# Altium PCB PCB1.PcbDoc
Units mm, origin at the board's own origin, x right, y up, seen from the top; angles counter-clockwise.
Board outline 152.4 x 101.6 mm, 2 copper layers (Top Layer, Bottom Layer); 17 components, 12 nets, 43 pads, 26 vias.
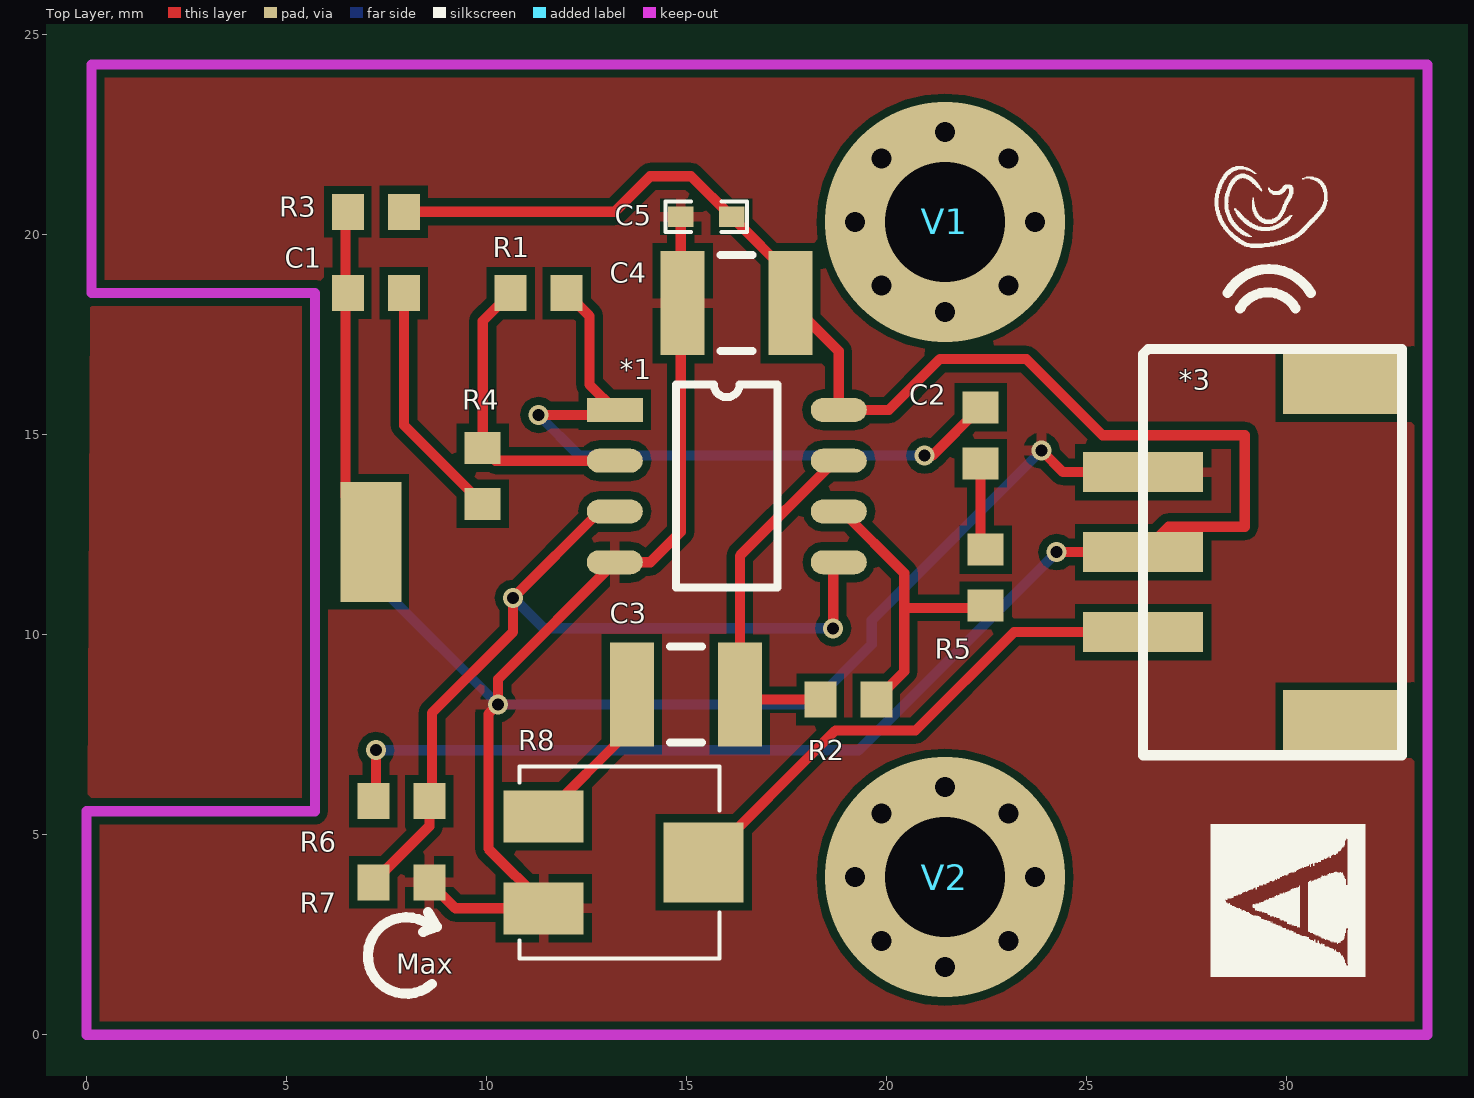
[diagram p0: Top Layer view]
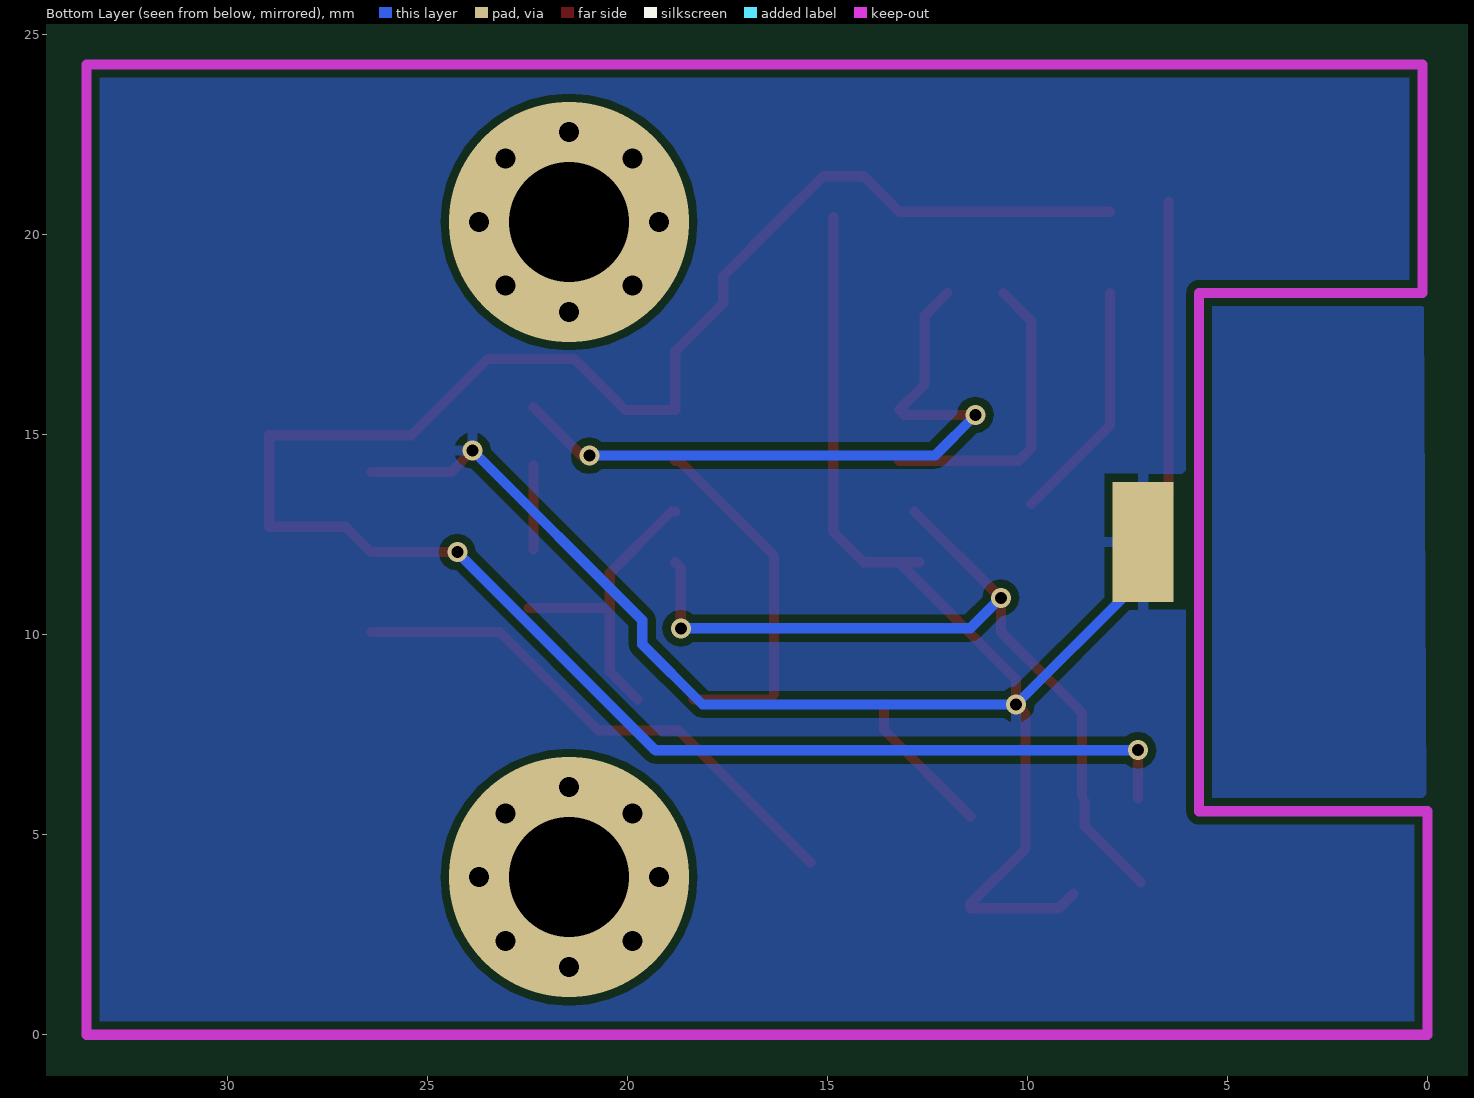
[diagram p1: Bottom Layer view, seen from below]

## Layer stack, top to bottom
Top Layer: signal copper 0.0356
Dielectric: dielectric 0.32, FR-4, Dk 4.8
Bottom Layer: signal copper 0.0356

## Board outline
-100.457,-42.926 51.943,-42.926 51.943,58.674 -100.457,58.674

## Design rules (kind name [scope] priority, off if disabled: settings)
Clearance [All] p1: gap=0.2
PolygonConnect [All] p1: connectstyle=Relief reliefconductorwidth=0.254 reliefentries=4 polygonreliefangle="90 Angle"
RoutingVias [All] p1: holewidth=0.711 width=1.27 viastyle="Through Hole" minholewidth=0.711 minwidth=1.27 maxholewidth=0.711 maxwidth=1.27
SilkscreenOverComponentPads [All] p1: minsilkscreentomaskgap=0.254
SolderMaskExpansion [All] p1: expansion=0.102
Width [All] p1: maxlimit=0.254 minlimit=0.254 preferedwidth=0.254
27 further rules are at their usual default settings.

## Components (designator, comment, footprint, x,y, rotation, side; value= is the part's Value field where it differs from the comment)
*1 "LM358" HMC_S8 13.208,15.621 r0 top
*3 "sh-2.0" sh-2.0 26.416,12.065 r90 top
C1 "CAP" 1608[0603] 7.239,18.542 r0 top
C2 "CAP" 1608[0603] 22.352,14.986 r270 top
C3 "cap1210" C1210 14.986,8.509 r180 top
C4 "cap1210" C1210 16.256,18.288 r180 top
C5 "CAP" 0402 14.859,20.447 r0 top
R1 "30K" 1608[0603] 11.303,18.542 r0 top
R2 "10K" 1608[0603] 19.05,8.382 r180 top
R3 "10K" 1608[0603] 7.239,20.574 r0 top
R4 "1K" 1608[0603] 9.906,13.97 r90 top
R5 "1K" 1608[0603] 22.479,11.43 r270 top
R6 "10K" 1608[0603] 7.874,5.842 r0 top
R7 "10K" 1608[0603] 7.874,3.81 r0 top
R8 "10k" BORUNS_3314J-1 11.43,5.461 r270 top
V1 "Via" VIA 21.463,20.32 r0 top
V2 "Via" VIA 21.463,3.937 r0 top

## Footprints (in the part's own frame and the unit in brackets; to place one, negate y for a bottom-side part, rotate by r counter-clockwise, add the part's x,y. Pads: shape width x height; smd on the part's side, far side on the other; paste and mask are expansions set on the pad)
0402 [mil]
  rect 25x20 smd: 1(0,0) 2(50,0)
  silkscreen extent -15,-15 65,15
1608[0603] [mm] "Chip Capacitor, Body 1.6x0.8mm, IPC High Density"
  rect 0.8x0.9 smd: 1(-0.7,0) 2(0.7,0)
  body extent -0.87,-0.48 0.87,0.48, height 1.3
BORUNS_3314J-1 [mm]
  rect 1.3x2 smd: 1(0,0) 2(2.3,0)
  rect 2x2 smd: 3(1.15,4)
  silkscreen extent -1.25,-0.6 3.55,4.4
C1210 [mm] "Chip Capacitor, Body 3.2x2.5mm, IPC High Density"
  rect 1.1x2.6 smd: 1(-1.35,0) 2(1.35,0)
  silkscreen extent -0.4,-1.2 0.4,1.2, body extent -1.7,-1.35 1.7,1.35, height 1.3
HMC_S8 [mm]
  rect 1.4x0.6 smd: 1(0,0)
  oval 1.4x0.6 smd: 2(0,-1.27) 3(0,-2.54) 4(0,-3.81) 5(5.6,-3.81) 6(5.6,-2.54) 7(5.6,-1.27) 8(5.6,0)
  silkscreen extent 1.53,-4.44 4.06,0.64
sh-2.0 [mm]
  rect 1x3 smd: 1(-2,0) 2(0,0) 3(2,0) 3(2,0)
  rect 1.5x3 smd: GND(-4.2,-5) GND(4.2,-5)
  silkscreen extent -5.08,-6.48 5.08,0
VIA [mm]

## Part data
C3 C4: library part cap0603
R1 R2 R3 R4 R5 R6 R7: library part RES
R8: library part "Res Tap"

## Free pads (board coordinates)
  rect 1.524x3 smd: 0(7.112,12.319)
  rect 1.524x3 smd far side: 0(7.112,12.319)

## Via types
v1: diameter 1, hole 0.5, Top Layer to Bottom Layer, 16 vias
v2: diameter 0.5, hole 0.3, Top Layer to Bottom Layer, 8 vias
v3: diameter 6, hole 3, Top Layer to Bottom Layer, 2 vias

## Nets (pads, with @x,y where several pads share a name; then routed paths per layer and width w, separated by ;. In a path a pad name is that pad's centre, name@x,y a point inside that pad or via, vN(x,y) a via of type N, cw(c..) or ccw(c..) an arc to the next point about the centre after c; other vN are vias at no path point)
GND: *1.4 *3.3 C4.2 C5.1 pad.0@7.112,12.319 R7.2 R8.2 | length 47.1
  Top Layer w0.254: R7.2@8.859,3.525 9.223,3.161 R8.2 11.43,3.272 10.049,4.653 10.049,8.017 v2(10.287,8.255) 10.287,8.89 *1.4 ; *1.4@12.7,11.811 *1.4 ; C5.1 14.859,12.573 14.097,11.811 *1.4 ; v2(23.876,14.605) 24.416,14.065 *3.3@26.416,14.065
  Bottom Layer w0.254: pad.0@7.366,11.176 v2(10.287,8.255) 18.124,8.255 19.631,9.762 19.631,10.36 v2(23.876,14.605)
Net*1_1: *1.1 C2.1 R1.2 | length 17.2
  Top Layer w0.254: v2(11.303,15.494) *1.1@13.081,15.494 ; R1.2 12.573,17.972 12.573,16.256 *1.1 ; v2(20.955,14.478) 21.144,14.478 C2.1
  Bottom Layer w0.254: v2(11.303,15.494) 12.319,14.478 v2(20.955,14.478)
Net*1_2: *1.2 R1.1 R4.2 | length 7.6
  Top Layer w0.254: R1.1 9.906,17.845 R4.2 10.225,14.351 *1.2
Net*1_3: *1.3 *1.5 R6.2 R7.1 | length 21.5
  Top Layer w0.254: R7.1 8.574,5.21 R6.2 ; R6.2@8.636,5.969 8.636,8.041 10.668,10.073 v2(10.668,10.922) *1.3@12.827,13.081 ; v2(18.669,10.16) 18.669,11.672 *1.5
  Bottom Layer w0.254: v2(10.668,10.922) 11.43,10.16 v2(18.669,10.16)
Net*1_6: *1.6 R2.1 R5.2 | length 7.8
  Top Layer w0.254: *1.6 18.901,13.081 20.447,11.535 20.447,10.668 ; R2.1 20.447,9.079 20.447,10.668 ; R5.2@22.479,10.668 20.447,10.668
Net*1_7: *1.7 C3.1 R2.2 | length 8.8
  Top Layer w0.254: C3.1 16.336,11.972 18.715,14.351 *1.7 ; C3.1@16.463,8.382 R2.2
Net*3_3: *3.1 R8.3 | length 13.4
  Top Layer w0.254: R8.3 18.724,7.605 20.728,7.605 23.188,10.065 *3.1
NetC1_1: C1.1 pad.0@7.112,12.319 R3.1 | length 8
  Top Layer w0.254: R3.1@6.477,20.828 6.477,13.462 pad.0@7.112,13.462
NetC1_2: C1.2 R4.1 | length 6.1
  Top Layer w0.254: C1.2 7.939,15.237 R4.1
NetC2_2: C2.2 R5.1 | length 2.1
  Top Layer w0.254: R5.1@22.352,12.13 C2.2@22.352,14.224
NetC3_2: C3.2 R8.1 | length 3.7
  Top Layer w0.254: R8.1 13.589,7.62 C3.2@13.589,8.255
VCC: *1.8 *3.2 C4.1 C5.2 R3.2 R6.1 | length 53.9
  Top Layer w0.254: R6.1@7.239,5.907 v2(7.239,7.112) ; R3.2 13.208,20.574 14.097,21.463 15.113,21.463 C5.2 17.606,18.97 C4.1 18.808,17.086 *1.8 20.066,15.621 21.336,16.891 23.495,16.891 25.4,14.986 28.956,14.986 28.956,12.7 27.051,12.7 *3.2 v2(24.257,12.065)
  Bottom Layer w0.254: v2(7.239,7.112) 19.304,7.112 v2(24.257,12.065)
pads on no net: *3.GND
copper on no net:
  other v1: 21.463,1.687 19.872,2.346 23.054,2.346 19.213,3.937 23.713,3.937 19.872,5.528 23.054,5.528 21.463,6.187 21.463,18.07 19.872,18.729 23.054,18.729 19.213,20.32 23.713,20.32 19.872,21.911 23.054,21.911 21.463,22.57
  other v3: 21.463,3.937 21.463,20.32

## Polygon pours and split planes (outlines as drawn)
GND on Top Layer "Top Layer-No Net" (solid, pour order 4): 0.127,24.13 0.254,24.257 33.528,24.257 33.528,0 33.274,0.254 0,0.254
GND on Bottom Layer "Top Layer-No Net" (solid, pour order 6): 0.127,24.257 33.528,24.257 33.528,0 0,0

## Keep-outs
Keep-Out Layer:
  lines w0.254: 0,0 0,5.588 5.715,5.588 5.715,18.542 0.127,18.542 0.127,24.257 33.528,24.257 33.528,0 0,0

## Silkscreen, mask and mechanical layers (free items; w line width, h text height)
Top Overlay:
  drawing of 2373 lines, arcs and shapes, not listed
  text "Max" at 7.747,1.524 h0.5
Top Solder:
  circle w0.5: c25.785,4.826 r0.25
  text "Analog Sound Sensor" at 0.889,22.225 h1